# Altium PCB bt-kbd-v2a.PcbDoc
Units mm, origin at the board's own origin, x right, y up, seen from the top; angles counter-clockwise.
Board outline 60.7 x 53 mm, 2 copper layers (Top Layer, Bottom Layer), stack 0.781 mm thick; 60 components, 23 nets, 380 pads, 109 vias.
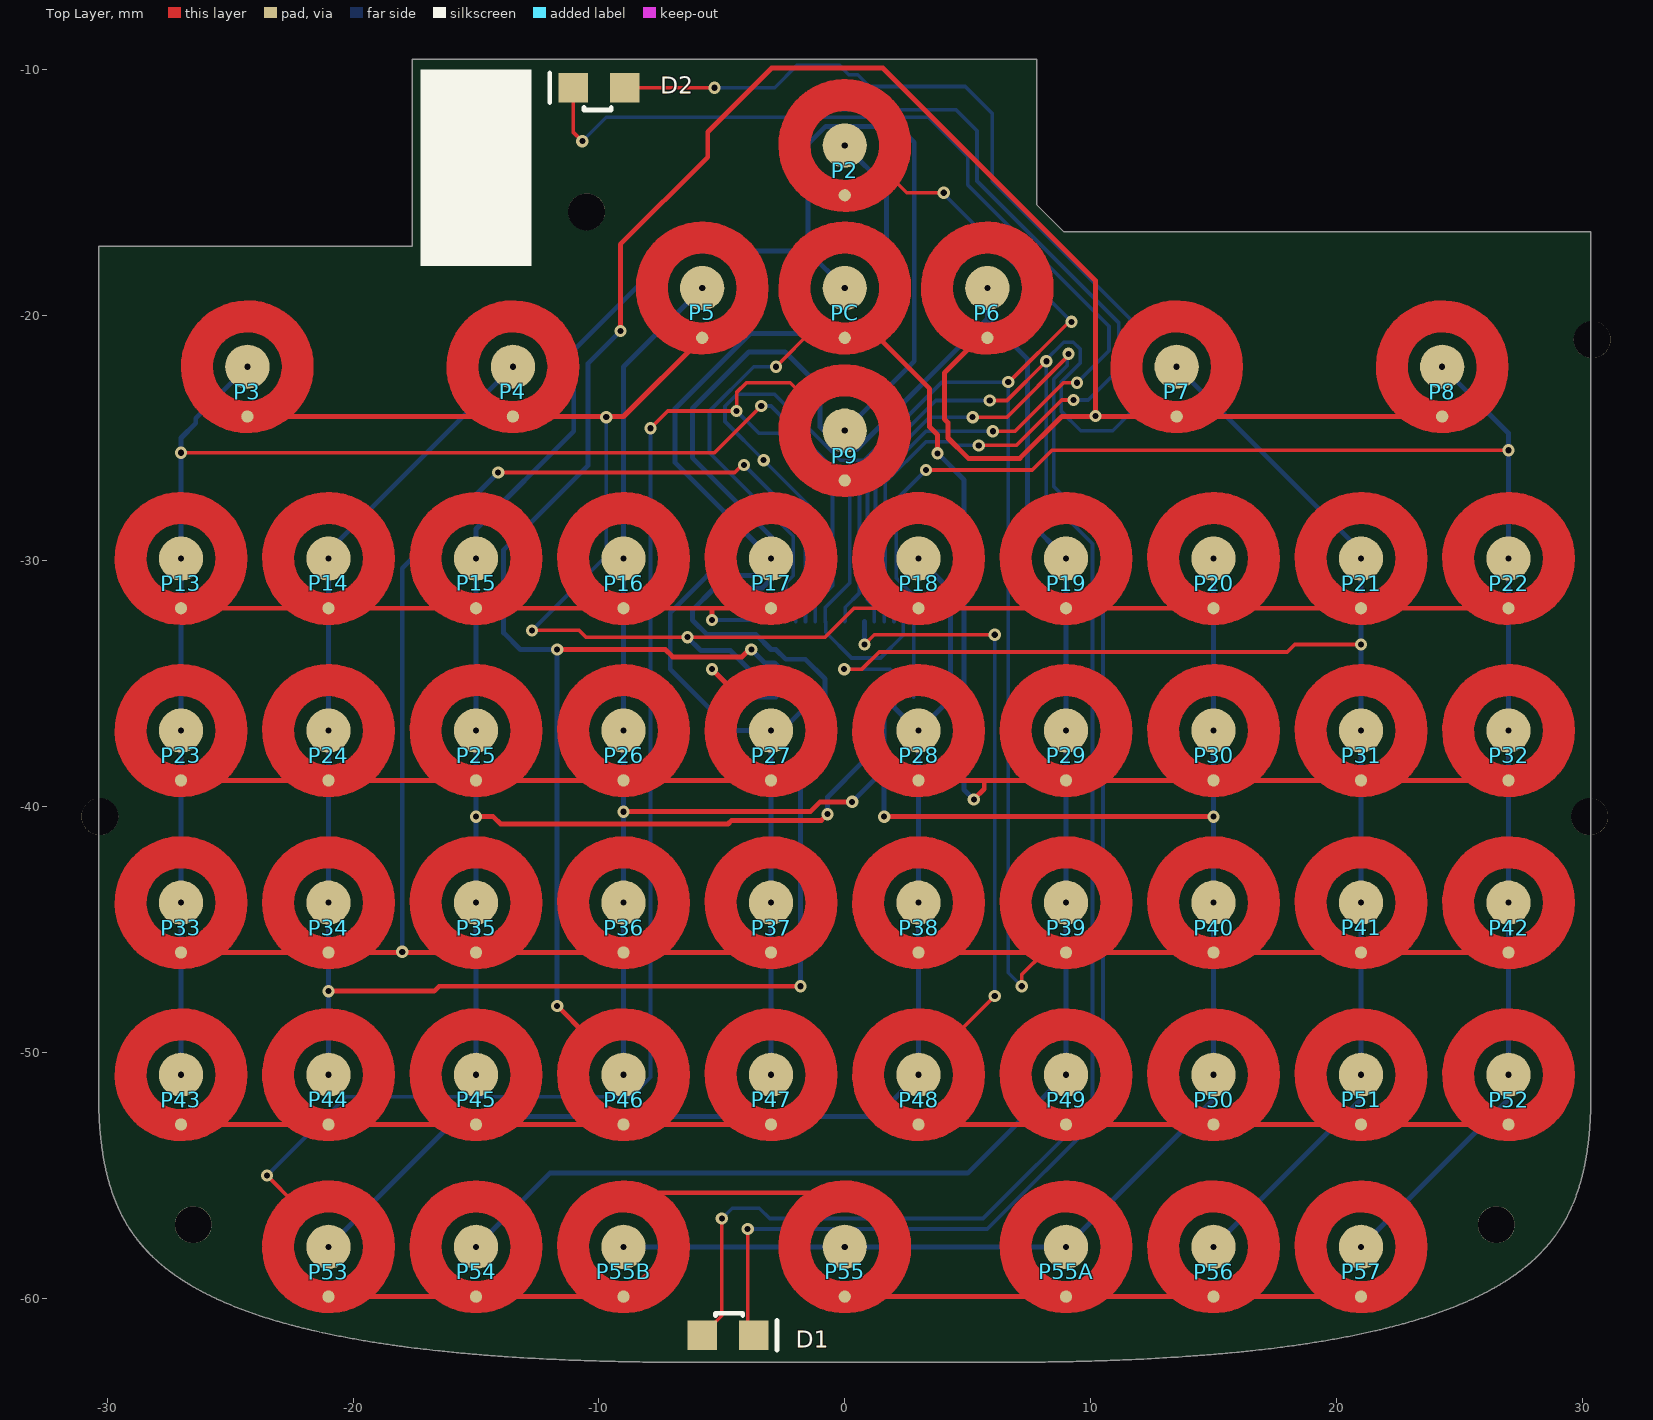
[diagram p0: Top Layer view]
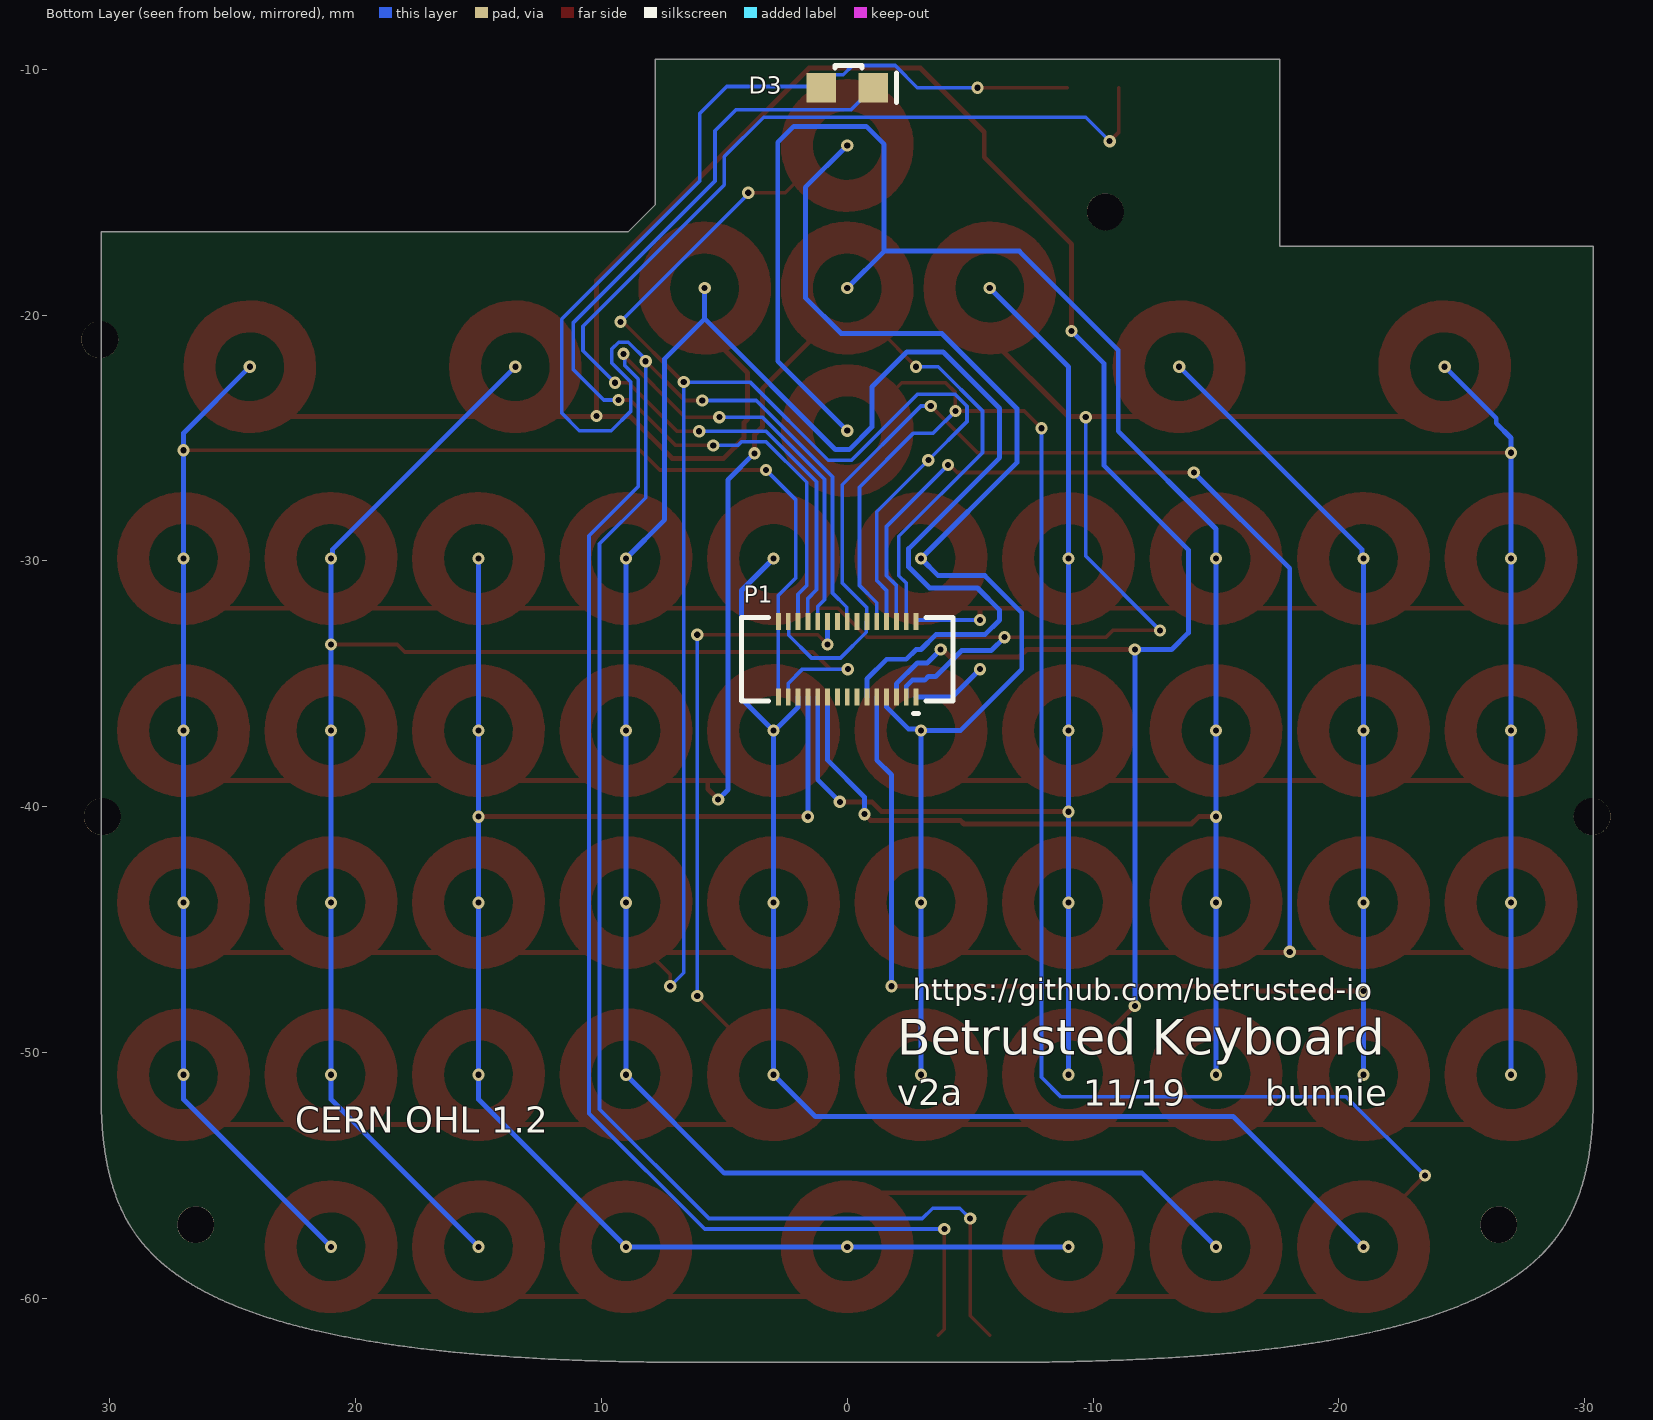
[diagram p1: Bottom Layer view, seen from below]

## Layer stack, top to bottom
Top Solder: solder mask 0.0102, Solder Resist, Dk 3.5
Top Layer: signal copper 0.035
Dielectric 1: core 0.7112, Core-039, Dk 4.8
Bottom Layer: signal copper 0.035
Bottom Solder: solder mask 0.0102, Solder Resist, Dk 3.5

## Board outline
754 vertices, not listed, extent -30.35,-62.6 30.35,-9.6

## Design rules (kind name [scope] priority, off if disabled: settings)
Clearance [All] p1: gap=0.15 ignorepadtopadclearanceinfootprint=FALSE
MinimumSolderMaskSliver [All] p1 off: minsoldermaskwidth=0.254
PolygonConnect [All] p1: connectstyle=Relief reliefconductorwidth=0.254 reliefentries=4 polygonreliefangle="90 Angle" airgapwidth=0.254
RoomDefinition kbd [InComponentClass('kbd')] p1 off: confinementstyle=ConfineIn formatcopy=TRUE lockcomponents=FALSE outline 31.498,-61.146 36.098,-61.146 36.098,-49.446 31.498,-49.446
RoutingVias [All] p1: holewidth=0.25 width=0.5 viastyle="Through Hole" minholewidth=0.25 minwidth=0.5 maxholewidth=0.25 maxwidth=0.5
SilkToSilkClearance [All] p1 off: silktosilkclearance=0.254
SilkToSolderMaskClearance [IsPad] p1 off: minsilkscreentomaskgap=0.254 clearancetoexposedcopper=TRUE
SolderMaskExpansion [All] p1 off: expansion=0.102
Width [All] p1: maxlimit=5 minlimit=0.15 preferedwidth=0.2
27 further rules are at their usual default settings.

## Components (designator, comment, footprint, x,y, rotation, side; value= is the part's Value field where it differs from the comment)
D1 "white SML-R1" ROHM_SML-R1 -4.75,-61.5 r270 top
D2 "white SML-R1" ROHM_SML-R1 -10,-10.75 r90 top
D3 "white SML-R1" ROHM_SML-R1 0,-10.75 r270 bottom
P1 "DF40C-30DS-0.4V(51)" HRS_DF40C-30DS-0.4V(51) 0,-34 r180 bottom
P2 "4mm Dome" 4MM_DOME_SW#1 0,-13.1 r0 top
P3 "4mm Dome" 4MM_DOME_SW#2 -24.3,-22.1 r0 top
P4 "4mm Dome" 4MM_DOME_SW#1 -13.5,-22.1 r0 top
P5 "4mm Dome" 4MM_DOME_SW#2 -5.8,-18.9 r0 top
P6 "4mm Dome" 4MM_DOME_SW#1 5.8,-18.9 r0 top
P7 "4mm Dome" 4MM_DOME_SW#1 13.5,-22.1 r0 top
P8 "4mm Dome" 4MM_DOME_SW#2 24.3,-22.1 r0 top
P9 "4mm Dome" 4MM_DOME_SW#1 0,-24.7 r0 top
P13 "4mm Dome" 4MM_DOME_SW#2 -27,-29.9 r0 top
P14 "4mm Dome" 4MM_DOME_SW#1 -21,-29.9 r0 top
P15 "4mm Dome" 4MM_DOME_SW#3 -15,-29.9 r0 top
P16 "4mm Dome" 4MM_DOME_SW#1 -9,-29.9 r0 top
P17 "4mm Dome" 4MM_DOME_SW#1 -3,-29.9 r0 top
P18 "4mm Dome" 4MM_DOME_SW#3 3,-29.9 r0 top
P19 "4mm Dome" 4MM_DOME_SW#1 9,-29.9 r0 top
P20 "4mm Dome" 4MM_DOME_SW#1 15,-29.9 r0 top
P21 "4mm Dome" 4MM_DOME_SW#1 21,-29.9 r0 top
P22 "4mm Dome" 4MM_DOME_SW#2 27,-29.9 r0 top
P23 "4mm Dome" 4MM_DOME_SW#2 -27,-36.9 r0 top
P24 "4mm Dome" 4MM_DOME_SW#1 -21,-36.9 r0 top
P25 "4mm Dome" 4MM_DOME_SW#3 -15,-36.9 r0 top
P26 "4mm Dome" 4MM_DOME_SW#1 -9,-36.9 r0 top
P27 "4mm Dome" 4MM_DOME_SW#1 -3,-36.9 r0 top
P28 "4mm Dome" 4MM_DOME_SW#2 3,-36.9 r0 top
P29 "4mm Dome" 4MM_DOME_SW#3 9,-36.9 r0 top
P30 "4mm Dome" 4MM_DOME_SW#3 15,-36.9 r0 top
P31 "4mm Dome" 4MM_DOME_SW#1 21,-36.9 r0 top
P32 "4mm Dome" 4MM_DOME_SW#1 27,-36.9 r0 top
P33 "4mm Dome" 4MM_DOME_SW#2 -27,-43.9 r0 top
P34 "4mm Dome" 4MM_DOME_SW#3 -21,-43.9 r0 top
P35 "4mm Dome" 4MM_DOME_SW#1 -15,-43.9 r0 top
P36 "4mm Dome" 4MM_DOME_SW#1 -9,-43.9 r0 top
P37 "4mm Dome" 4MM_DOME_SW#2 -3,-43.9 r0 top
P38 "4mm Dome" 4MM_DOME_SW#2 3,-43.9 r0 top
P39 "4mm Dome" 4MM_DOME_SW#1 9,-43.9 r0 top
P40 "4mm Dome" 4MM_DOME_SW#1 15,-43.9 r0 top
P41 "4mm Dome" 4MM_DOME_SW#1 21,-43.9 r0 top
P42 "4mm Dome" 4MM_DOME_SW#3 27,-43.9 r0 top
P43 "4mm Dome" 4MM_DOME_SW#2 -27,-50.9 r0 top
P44 "4mm Dome" 4MM_DOME_SW#3 -21,-50.9 r0 top
P45 "4mm Dome" 4MM_DOME_SW#1 -15,-50.9 r0 top
P46 "4mm Dome" 4MM_DOME_SW#3 -9,-50.9 r0 top
P47 "4mm Dome" 4MM_DOME_SW#2 -3,-50.9 r0 top
P48 "4mm Dome" 4MM_DOME_SW#1 3,-50.9 r0 top
P49 "4mm Dome" 4MM_DOME_SW#1 9,-50.9 r0 top
P50 "4mm Dome" 4MM_DOME_SW#1 15,-50.9 r0 top
P51 "4mm Dome" 4MM_DOME_SW#1 21,-50.9 r0 top
P52 "4mm Dome" 4MM_DOME_SW#1 27,-50.9 r0 top
P53 "4mm Dome" 4MM_DOME_SW#1 -21,-57.9 r0 top
P54 "4mm Dome" 4MM_DOME_SW#3 -15,-57.9 r0 top
P55 "4mm Dome" 4MM_DOME_SW#4 0,-57.9 r0 top
P55A "4mm Dome" 4MM_DOME_SW#1 9,-57.9 r0 top
P55B "4mm Dome" 4MM_DOME_SW#1 -9,-57.9 r0 top
P56 "4mm Dome" 4MM_DOME_SW#3 15,-57.9 r0 top
P57 "4mm Dome" 4MM_DOME_SW#2 21,-57.9 r0 top
PC "4mm Dome" 4MM_DOME_SW#1 0,-18.9 r0 top

## Footprints (in the part's own frame and the unit in brackets; to place one, negate y for a bottom-side part, rotate by r counter-clockwise, add the part's x,y. Pads: shape width x height; smd on the part's side, far side on the other; paste and mask are expansions set on the pad)
4MM_DOME_SW#1 [mm] "4mm diameter dome switch footprint"
  round 1.8 smd mask+2.1: 1(0,0)
  round 0.5 smd: 2(0,-2.025)
  Top Layer lines w1.3: -2.031,-0.277 ccw(c0,0) 1.718,-1.118 ccw(c0,0) 2.05,0 ccw(c0,0) -2.031,-0.277
  body extent -2,-2 2,2, height 0.3
4MM_DOME_SW#2 [mm] "4mm diameter dome switch footprint"
  round 1.8 smd mask+2.1: 1(0,0)
  round 0.5 smd: 2(0,-2.025)
  Top Layer lines w1.3: 0.319,-2.025 cw(c0,0) 2.05,0 cw(c0,0) 0.319,-2.025
  body extent -2,-2 2,2, height 0.3
4MM_DOME_SW#3 [mm] "4mm diameter dome switch footprint"
  round 1.8 smd mask+2.1: 1(0,0)
  round 0.5 smd: 2(0,-2.025)
  Top Layer lines w1.3: -2.048,0.1 ccw(c0,0) -0.319,-2.025 ccw(c0,0) 0.319,-2.025 ccw(c0,0) 2.05,0 ccw(c0,0) -2.048,0.1
  body extent -2,-2 2,2, height 0.3
4MM_DOME_SW#4 [mm] "4mm diameter dome switch footprint"
  round 1.8 smd mask+2.1: 1(0,0)
  round 0.5 smd: 2(0,-2.025)
  Top Layer lines w1.3: -2.048,0.098 cw(c0,0) -0.534,1.979 cw(c0,0) 2.05,0 cw(c0,0) 0.319,-2.025 cw(c0,0) -0.319,-2.025 cw(c0,0) -2.048,0.098
  body extent -2,-2 2,2, height 0.3
HRS_DF40C-30DS-0.4V(51) [mm] "0.4mm Pitch, Board to Board Connector, 1.5mm mated height"
  rect 0.2x0.7 smd mask+0.06: 1(2.8,-1.54) 2(2.4,-1.54) 3(2,-1.54) 4(1.6,-1.54) 5(1.2,-1.54) 6(0.8,-1.54) 7(0.4,-1.54) 8(0,-1.54) 9(-0.4,-1.54) 10(-0.8,-1.54) 11(-1.2,-1.54) 12(-1.6,-1.54) 13(-2,-1.54) 14(-2.4,-1.54) 15(-2.8,-1.54) 16(2.8,1.54) 17(2.4,1.54) 18(2,1.54) 19(1.6,1.54) 20(1.2,1.54) 21(0.8,1.54) 22(0.4,1.54) 23(0,1.54) 24(-0.4,1.54) 25(-0.8,1.54) 26(-1.2,1.54) 27(-1.6,1.54) 28(-2,1.54) 29(-2.4,1.54) 30(-2.8,1.54)
  silkscreen extent -4.3,-2.2 4.3,1.7, body extent -4.3,-1.69 4.3,1.69, height 1.44
ROHM_SML-R1 [mm] "PICOLED-side firing, 0.2mm thick"
  rect 1.2x1.2 smd mask+0.07: 1(0,-1.05) 2(0,1.05)
  silkscreen extent -0.9,-0.5 0.6,2, body extent -0.75,-0.8 0.35,0.8, height 0.2

## Part data
D1 D2 D3: library part LED2, "Red LED", MPN=SMLR13WBDW, LatestRevisionDate=17-Jul-2002, LatestRevisionNote="Re-released for DXP Platform.", MYPN=D-LED-WHT-SIDE-0.2mm, PackageReference=3.2X1.6X1.1, PackageVersion=Feb-2002, Published=8-Jun-2000, Publisher="Altium Limited", VENDOR=ROHM
P1: library part "Header 15X2A", "Header, 15-Pin, Dual row", LatestRevisionDate=17-Jul-2002, LatestRevisionNote="Re-released for DXP Platform.", MPN=DF40C-30DS-0.4V(51), MYPN="J-DF40C-30DS-0.4V(51) or DF40JC-30DS-0.4V(53)", Publisher="Altium Limited", System=Connector, VENDOR=Hirose
P2 P3 P4 P5 P6 P7 P8 P9 P13 P14 P15 P16 P17 P18 P19 P20 P21 P22 P23 P24 P25 P26 P27 P28 P29 P30 P31 P32 P33 P34 P35 P36 P37 P38 P39 P40 P41 P42 P43 P44 P45 P46 P47 P48 P49 P50 P51 P52 P53 P54 P55 P55A P55B P56 P57 PC: library part "Header 2", "Header, 2-Pin", LatestRevisionDate=17-Jul-2002, LatestRevisionNote="Re-released for DXP Platform.", Publisher="Altium Limited"

## Free pads (board coordinates)
  round 1.5 hole 1.5 unplated mask+0.5: 0(-30.3,-40.4) 0(-26.5,-57) 0(-10.5,-15.8) 0(26.5,-57) 0(30.3,-40.4) 0(30.4,-21)
  rect 2.489x0.051 on Bottom Overlay: 1(14.914,-48.786) 1(14.914,-48.735) 1(14.914,-48.837) 1(17.2,-46.449)
  rect 2.54x0.051 on Bottom Overlay: 1(14.939,-49.091) 1(14.939,-48.989) 1(14.939,-48.939) 1(14.939,-48.888) 1(14.939,-48.685) 1(14.939,-48.583) 1(14.939,-48.532) 1(14.939,-49.04) 1(14.939,-48.634) 1(14.939,-48.481) 1(15.041,-48.278) 1(19.359,-48.278) 1(19.461,-49.04) 1(19.461,-48.989) 1(19.461,-48.939) 1(19.461,-48.888) 1(19.461,-48.837) 1(19.461,-48.786) 1(19.461,-48.735) 1(19.461,-48.685) 1(19.461,-48.634) 1(19.461,-48.583) 1(19.461,-48.532) 1(19.461,-48.481)
  rect 2.591x0.051 on Bottom Overlay: 1(14.965,-49.193) 1(14.965,-49.142) 1(14.965,-48.431) 1(14.965,-48.38) 1(14.965,-48.329) 1(15.016,-49.243) 1(19.384,-49.243) 1(19.435,-49.142) 1(19.435,-49.091) 1(19.435,-48.38) 1(19.435,-49.193) 1(19.435,-48.431)
  rect 0.102x0.051 on Bottom Overlay: 1(15.041,-45.992) 1(16.108,-51.225) 1(18.292,-51.225) 1(19.359,-45.992)
  rect 0.254x0.051 on Bottom Overlay: 1(15.066,-51.479) 1(15.066,-46.043) 1(16.082,-51.174) 1(18.318,-51.174) 1(19.334,-51.479) 1(19.334,-46.043)
  rect 0.356x0.051 on Bottom Overlay: 1(15.066,-51.428) 1(15.066,-46.094) 1(16.032,-51.123) 1(18.368,-51.123) 1(19.334,-46.094)
  rect 0.152x0.051 on Bottom Overlay: 1(15.066,-51.529) 1(19.334,-51.529)
  rect 0.457x0.051 on Bottom Overlay: 1(15.066,-46.145)
  rect 0.508x0.051 on Bottom Overlay: 1(15.092,-51.377) 1(19.308,-51.377) 1(19.308,-46.145)
  rect 0.61x0.051 on Bottom Overlay: 1(15.092,-51.326) 1(15.092,-46.195) 1(19.308,-46.195)
  rect 0.711x0.051 on Bottom Overlay: 1(15.092,-46.246)
  rect 0.864x0.051 on Bottom Overlay: 1(15.117,-51.225) 1(15.117,-46.297) 1(17.2,-45.23) 1(19.283,-51.225) 1(19.283,-46.297)
  rect 0.965x0.051 on Bottom Overlay: 1(15.117,-46.348) 1(17.2,-45.383) 1(17.2,-45.332) 1(17.2,-45.281) 1(19.283,-46.348)
  rect 0.762x0.051 on Bottom Overlay: 1(15.117,-51.275) 1(19.283,-51.275) 1(19.283,-46.246)
  rect 1.016x0.051 on Bottom Overlay: 1(15.143,-51.174) 1(17.175,-45.433) 1(19.257,-51.174)
  rect 2.337x0.051 on Bottom Overlay: 1(15.143,-49.294) 1(15.905,-47.77) 1(19.257,-49.294)
  rect 1.219x0.051 on Bottom Overlay: 1(15.143,-46.449) 1(17.175,-45.992) 1(19.257,-46.449)
  rect 1.118x0.051 on Bottom Overlay: 1(15.143,-46.399) 1(15.143,-51.123) 1(17.175,-45.738) 1(19.257,-51.123) 1(19.257,-46.399)
  rect 2.286x0.051 on Bottom Overlay: 1(15.168,-48.227) 1(18.47,-47.77) 1(19.181,-48.227)
  rect 2.134x0.051 on Bottom Overlay: 1(15.295,-49.345) 1(15.803,-47.821) 1(18.597,-47.821) 1(19.105,-49.345)
  rect 1.829x0.051 on Bottom Overlay: 1(15.346,-50.971) 1(15.447,-50.717) 1(15.498,-50.615) 1(15.498,-49.447) 1(15.498,-48.126) 1(15.549,-49.497) 1(15.549,-48.075) 1(15.752,-50.056) 1(15.752,-50.005) 1(18.648,-50.056) 1(18.648,-50.005) 1(18.8,-48.024) 1(18.851,-50.564) 1(18.851,-49.497) 1(18.851,-49.447) 1(18.851,-48.075) 1(18.902,-50.666) 1(18.902,-50.615) 1(18.902,-48.126) 1(18.953,-50.717) 1(19.054,-50.971)
  rect 1.93x0.051 on Bottom Overlay: 1(15.346,-50.92) 1(15.651,-49.599) 1(15.651,-47.923) 1(15.752,-49.904) 1(15.752,-49.853) 1(18.648,-49.904) 1(18.648,-49.853) 1(18.749,-49.599) 1(18.749,-47.923) 1(18.8,-49.548) 1(19.054,-50.92)
  rect 2.032x0.051 on Bottom Overlay: 1(15.346,-48.177) 1(15.701,-49.701) 1(15.752,-49.802) 1(15.752,-49.751) 1(18.648,-49.802) 1(18.648,-49.751) 1(18.648,-49.701) 1(19.054,-48.177)
  rect 1.676x0.051 on Bottom Overlay: 1(15.371,-51.072) 1(15.727,-50.209)
  rect 1.778x0.051 on Bottom Overlay: 1(15.371,-51.021) 1(15.524,-50.564) 1(15.574,-50.513) 1(15.574,-50.463) 1(15.625,-50.412) 1(15.676,-50.31) 1(18.724,-50.31) 1(18.775,-50.412) 1(18.826,-50.513) 1(18.826,-50.463) 1(19.029,-51.021)
  rect 1.88x0.051 on Bottom Overlay: 1(15.371,-50.869) 1(15.371,-50.818) 1(15.422,-50.767) 1(15.473,-50.666) 1(15.473,-49.396) 1(15.574,-49.548) 1(15.574,-48.024) 1(15.625,-47.973) 1(15.727,-49.955) 1(18.622,-49.955) 1(18.775,-47.973) 1(18.927,-49.396) 1(18.978,-50.818) 1(18.978,-50.767) 1(19.029,-50.869)
  rect 1.727x0.051 on Bottom Overlay: 1(15.651,-50.361) 1(15.701,-50.259) 1(15.752,-50.158) 1(15.752,-50.107) 1(17.175,-46.297) 1(18.648,-50.209) 1(18.648,-50.158) 1(18.648,-50.107) 1(18.699,-50.259) 1(18.749,-50.361) 1(19.003,-51.072)
  rect 1.981x0.051 on Bottom Overlay: 1(15.676,-49.65) 1(15.727,-47.872) 1(17.2,-46.348) 1(18.673,-47.872) 1(18.724,-49.65)
  rect 4.674x0.051 on Bottom Overlay: 1(17.175,-47.313)
  rect 5.08x0.051 on Bottom Overlay: 1(17.175,-47.008)
  rect 4.877x0.051 on Bottom Overlay: 1(17.175,-47.161)
  rect 4.826x0.051 on Bottom Overlay: 1(17.2,-47.719) 1(17.2,-47.669) 1(17.2,-47.211)
  rect 4.724x0.051 on Bottom Overlay: 1(17.2,-47.618) 1(17.2,-47.262) 1(17.2,-47.567)
  rect 4.623x0.051 on Bottom Overlay: 1(17.2,-47.465) 1(17.2,-47.415) 1(17.2,-47.364) 1(17.2,-47.516)
  rect 5.029x0.051 on Bottom Overlay: 1(17.2,-47.059)
  rect 5.131x0.051 on Bottom Overlay: 1(17.2,-46.957)
  rect 5.232x0.051 on Bottom Overlay: 1(17.2,-46.907)
  rect 5.334x0.051 on Bottom Overlay: 1(17.2,-46.856) 1(17.2,-46.805)
  rect 5.537x0.051 on Bottom Overlay: 1(17.2,-46.703) 1(17.2,-46.653) 1(17.2,-46.551)
  rect 5.639x0.051 on Bottom Overlay: 1(17.2,-46.602)
  rect 5.436x0.051 on Bottom Overlay: 1(17.2,-46.5) 1(17.2,-46.754)
  rect 1.473x0.051 on Bottom Overlay: 1(17.2,-46.246)
  rect 1.27x0.051 on Bottom Overlay: 1(17.2,-46.195) 1(17.2,-46.145) 1(17.2,-46.094) 1(17.2,-46.043)
  rect 1.168x0.051 on Bottom Overlay: 1(17.2,-45.941) 1(17.2,-45.891) 1(17.2,-45.84) 1(17.2,-45.789)
  rect 1.067x0.051 on Bottom Overlay: 1(17.2,-45.586) 1(17.2,-45.535) 1(17.2,-45.484) 1(17.2,-45.687) 1(17.2,-45.637)
  rect 4.928x0.051 on Bottom Overlay: 1(17.2,-47.11)
  rect 2.184x0.051 on Bottom Overlay: 1(17.2,-46.399)
  rect 0.66x0.051 on Bottom Overlay: 1(19.283,-51.326)
  rect 0.406x0.051 on Bottom Overlay: 1(19.308,-51.428)
  rect 2.642x0.051 on Bottom Overlay: 1(19.41,-48.329)

## Via types
v1: diameter 0.5, hole 0.25, Top Layer to Bottom Layer, tented both sides, 109 vias

## Nets (pads, with @x,y where several pads share a name; then routed paths per layer and width w, separated by ;. In a path a pad name is that pad's centre, name@x,y a point inside that pad or via, vN(x,y) a via of type N, cw(c..) or ccw(c..) an arc to the next point about the centre after c; other vN are vias at no path point)
KEY0: P1.16 P13.2 P14.2 P15.2 P16.2 P17.2 | length 27.1
  Top Layer w0.2: P13.2 -26.681,-31.925 -21.319,-31.925 P14.2 -20.681,-31.925 -15.319,-31.925 P15.2 -14.681,-31.925 -9.319,-31.925 P16.2 -8.681,-31.925 -5.4,-31.925 ; v1(-5.4,-32.4) -5.4,-31.925 ; P17.2@-3,-31.95 -3.025,-31.925 -3.319,-31.925 -5.4,-31.925
  Bottom Layer w0.15: v1(-5.4,-32.4) -2.825,-32.4 -2.8,-32.425 P1.16
KEY1: P1.1 P23.2 P24.2 P25.2 P26.2 P27.2 | length 28.5
  Top Layer w0.2: P23.2 -26.681,-38.925 -24,-38.925 -21.319,-38.925 P24.2 -20.681,-38.925 -15.319,-38.925 P25.2 -14.681,-38.925 -9.319,-38.925 -8.681,-38.925 -3.319,-38.925 P27.2 ; v1(-5.4,-34.4) -4.408,-35.392 -4.408,-35.41
  Bottom Layer w0.2: v1(-5.4,-34.4) -4.26,-35.54 P1.1
KEY2: P1.18 P33.2 P34.2 P35.2 P36.2 P37.2 | length 62.8
  Top Layer w0.15: v1(-14.1,-26.4) -4.472,-26.4 -4.172,-26.1 v1(-4.1,-26.1)
  Top Layer w0.2: P33.2 -26.681,-45.925 -21.319,-45.925 P34.2 -20.681,-45.925 -15.319,-45.925 P35.2 -14.681,-45.925 -9.319,-45.925 P36.2 -8.681,-45.925 -3.319,-45.925 P37.2
  Bottom Layer w0.15: v1(-4.1,-26.1) -1.6,-28.6 -1.6,-30.6 -2,-31 P1.18
  Bottom Layer w0.2: v1(-18,-45.9) -18,-30.3 v1(-14.1,-26.4)
KEY3: P1.3 P6.2 P7.2 P8.2 P43.2 P44.2 P45.2 P46.2 P47.2 | length 129.2
  Top Layer w0.2: P43.2 -26.681,-52.925 -21.319,-52.925 P44.2 -20.681,-52.925 -15.319,-52.925 P45.2 -14.681,-52.925 -9.319,-52.925 P46.2 -8.681,-52.925 -3.319,-52.925 P47.2 ; v1(-11.7,-48.1) -10.475,-49.325 -10.312,-49.325 ; v1(-11.7,-33.6) -7.3,-33.6 -7,-33.9 -4.181,-33.9 -3.881,-33.6 v1(-3.8,-33.6) ; v1(-9.125,-20.65) -9.125,-17.125 -5.575,-13.575 -5.575,-12.55 -2.975,-9.95 1.55,-9.95 10.2,-18.6 v1(10.2,-24.1) ; 5.481,-20.925 4.05,-22.356 4.05,-24.225 4.2,-24.375 4.2,-25 5.025,-25.825 7.125,-25.825 8.825,-24.125 13.181,-24.125 ; P7.2 13.819,-24.125 23.981,-24.125 P8.2
  Bottom Layer w0.2: v1(-11.7,-48.1) v1(-11.7,-33.6) -13.2,-33.6 -13.875,-32.925 -13.875,-29.55 -10.45,-26.125 -10.45,-21.975 v1(-9.125,-20.65) ; v1(-3.8,-33.6) -3.25,-34.15 -2.85,-34.15 -2,-35 P1.3
KEY4: P1.2 P3.2 P4.2 P5.2 P18.2 P19.2 P20.2 P21.2 P22.2 | length 74.1
  Top Layer w0.15: v1(-12.725,-32.825) -10.8,-32.825 -10.525,-33.1 v1(-6.4,-33.1) -0.8,-33.1 0.375,-31.925 2.681,-31.925 P18.2
  Top Layer w0.2: P3.2 -23.981,-24.125 -13.819,-24.125 P4.2 -13.181,-24.125 -9,-24.125 -5.825,-20.95 P5.2 ; 3.319,-31.925 8.681,-31.925 ; P19.2 9.319,-31.925 14.681,-31.925 ; P20.2 15.319,-31.925 20.681,-31.925 ; P21.2 21.319,-31.925 26.681,-31.925 P22.2
  Bottom Layer w0.15: v1(-12.725,-32.825) -9.7,-29.8 v1(-9.7,-24.15)
  Bottom Layer w0.2: v1(-6.4,-33.1) -5.85,-33.65 -4.65,-33.65 -3.6,-34.7 -3.3,-34.7 -3.153,-34.847 -2.647,-34.847 -2.4,-35.095 P1.2
KEY5: P1.17 P28.2 P29.2 P30.2 P31.2 P32.2 PC.2 | length 61.4
  Top Layer w0.15: v1(-2.8,-22.1) -1.279,-20.579 -1.176,-20.579
  Top Layer w0.2: PC.2 0.319,-20.925 ; 1.375,-20.925 3.45,-23 3.45,-24.55 3.775,-24.875 v1(3.775,-25.625) ; P28.2 3.319,-38.925 5.675,-38.925 ; v1(5.25,-39.7) 5.675,-39.275 5.675,-38.925 ; P32.2 26.681,-38.925 21.319,-38.925 P31.2 20.681,-38.925 15.319,-38.925 P30.2 14.681,-38.925 9.319,-38.925 P29.2 8.681,-38.925 5.675,-38.925
  Bottom Layer w0.15: v1(-2.8,-22.1) -3.7,-22.1 -5.5,-23.9 -5.5,-25.6 -2.1,-29 -2.1,-30.6 -2.4,-30.9 P1.17
  Bottom Layer w0.2: v1(3.775,-25.625) 4.85,-26.7 4.85,-39.3 v1(5.25,-39.7)
KEY6: P1.19 P2.2 P38.2 P39.2 P40.2 P41.2 P42.2 | length 88.7
  Top Layer w0.15: 1.718,-14.218 2.525,-15.025 v1(4.025,-15.025) ; v1(6.65,-22.725) 6.678,-22.725 9.128,-20.275 v1(9.225,-20.275) ; v1(7.2,-47.3) 7.2,-46.825 8.1,-45.925
  Top Layer w0.2: P38.2 3.319,-45.925 8.1,-45.925 8.681,-45.925 P39.2 9.319,-45.925 14.681,-45.925 P40.2 15.319,-45.925 20.681,-45.925 P41.2 21.319,-45.925 26.681,-45.925 P42.2
  Bottom Layer w0.15: P1.19 -1.6,-31.2 -1.2,-30.8 -1.2,-28 v1(-3.3,-25.9) -4.875,-24.325 -4.875,-23.703 -4.397,-23.225 -2.85,-23.225 -0.175,-25.9 0.775,-25.9 3.95,-22.725 v1(6.65,-22.725) 6.65,-46.75 v1(7.2,-47.3) ; v1@4.025,-15.075 v1(9.225,-20.275)
KEY7: P1.25 P48.2 P49.2 P50.2 P51.2 P52.2 | length 47.6
  Top Layer w0.15: v1(0.8,-33.4) 1.2,-33 v1(6.1,-33) ; 4.259,-49.282 4.518,-49.282 v1(6.1,-47.7)
  Top Layer w0.2: P48.2 3.319,-52.925 8.681,-52.925 P49.2 9.319,-52.925 14.681,-52.925 P50.2 15.319,-52.925 20.681,-52.925 P51.2 21.319,-52.925 26.681,-52.925 P52.2
  Bottom Layer w0.15: v1(6.1,-47.7) v1(6.1,-33)
  Bottom Layer w0.2: v1(0.8,-33.4) P1.25
KEY8: P1.20 P9.2 P53.2 P54.2 P55.2 P55A.2 P55B.2 P56.2 P57.2 | length 106.3
  Top Layer w0.15: v1(-23.5,-55) -22.358,-56.142 -22.055,-56.142 ; v1(-7.9,-24.6) -7.2,-23.9 v1(-4.4,-23.9) -4.4,-23.15 -4,-22.75 -2.221,-22.75 -1.579,-23.392
  Top Layer w0.2: P53.2 -20.681,-59.925 -15.319,-59.925 P54.2 -14.681,-59.925 -9.319,-59.925 -8.681,-59.925 ; -8.825,-55.7 -0.754,-55.7 -0.534,-55.921 ; -0.319,-59.925 P55.2 0.319,-59.925 8.681,-59.925 9.319,-59.925 14.681,-59.925 P56.2 15.319,-59.925 20.681,-59.925 P57.2
  Bottom Layer w0.15: v1(-23.5,-55) -20.3,-51.8 -8.7,-51.8 -7.9,-51 v1(-7.9,-24.6) ; v1(-4.4,-23.9) -3.5,-24.8 -2.7,-24.8 -0.5,-27 -0.5,-31 -1.2,-31.7 P1.20
KEY9: P1.21 P1.29 P3.1 P13.1 P23.1 P33.1 P43.1 | length 70.2
  Top Layer w0.15: v1(-27,-25.6) -5.3,-25.6 v1(-3.4,-23.7)
  Bottom Layer w0.15: v1(-3.4,-23.7) -3,-23.7 0.2,-26.9 0.2,-30.9 -0.8,-31.9 P1.21 -0.775,-32.485 -0.775,-32.9 0.275,-33.95 1.45,-33.95 2.375,-33.025 2.375,-32.485 P1.29
  Bottom Layer w0.2: v1(-27,-50.9) v1(-27,-43.9) v1(-27,-36.9) v1(-27,-29.9) -27,-25 -26.4,-24.4 -26.4,-24.2 v1(-24.3,-22.1)
KEY10: P1.5 P4.1 P14.1 P24.1 P34.1 P44.1 | length 63.2
  Top Layer w0.2: v1(-21,-47.5) -16.7,-47.5 -16.5,-47.3 v1(-1.8,-47.3)
  Bottom Layer w0.2: v1(-21,-50.9) v1(-21,-43.9) v1(-21,-36.9) v1(-21,-29.9) -20.943,-29.843 -20.943,-29.543 v1(-13.5,-22.1) ; v1(-1.8,-47.3) -1.8,-38.7 -1.2,-38.1 P1.5
KEY11: P1.10 P9.1 P15.1 P25.1 P35.1 P45.1 PC.1 | length 86.5
  Top Layer w0.2: v1(-15,-40.4) -14.3,-40.4 -14,-40.7 -4.75,-40.7 -4.6,-40.55 -0.95,-40.55 v1(-0.7,-40.3)
  Bottom Layer w0.2: v1(-15,-50.9) v1(-15,-43.9) v1(-15,-40.4) v1(-15,-36.9) v1(-15,-29.9) -15,-28.7 -11.025,-24.725 -11.025,-21.425 -7,-17.4 -1.5,-17.4 ; v1(-0.7,-40.3) -0.7,-39.6 0.8,-38.1 P1.10 ; v1(0,-24.7) 2.825,-21.875 2.825,-12.975 2.175,-12.325 -0.775,-12.325 -1.5,-13.05 -1.5,-17.4 ; v1(0,-18.9) -1.5,-17.4
KEY12: P1.11 P5.1 P16.1 P26.1 P36.1 P46.1 | length 47.4
  Top Layer w0.2: v1(-9,-40.2) -1.4,-40.2 -1,-39.8 v1(0.3,-39.8)
  Bottom Layer w0.2: v1(-9,-50.9) v1(-9,-43.9) v1(-9,-40.2) v1(-9,-36.9) v1(-9,-29.9) -9,-22.1 v1(-5.8,-18.9) ; v1(0.3,-39.8) 1.2,-38.9 P1.11
KEY13: P1.4 P2.1 P17.1 P27.1 P37.1 P47.1 | length 53.7
  Bottom Layer w0.2: v1(-3,-50.9) v1(-3,-43.9) v1(-3,-36.9) ; P1.4 -1.6,-35.944 -2.499,-36.843 -2.943,-36.843 v1(-3,-36.9) ; v1(0,-13.1) 1.7,-14.8 1.7,-19.3 0.25,-20.75 -3.85,-20.75 -6.9,-23.8 -6.9,-26 v1(-3,-29.9) -3.7,-30.6 -5.6,-30.6 -7.1,-32.1 -7.1,-34.4 -4.6,-36.9 v1(-3,-36.9)
KEY14: P1.13 P18.1 P28.1 P38.1 P48.1 P53.1 | length 50.8
  Bottom Layer w0.2: v1(-21,-57.9) -15.7,-52.6 1.3,-52.6 v1(3,-50.9) v1(3,-43.9) v1(3,-36.9) ; P1.13 2,-35.944 2.956,-36.9 v1(3,-36.9) ; v1(3,-29.9) 4.3,-31.2 4.3,-35.6 v1(3,-36.9)
KEY15: P1.6 P6.1 P19.1 P29.1 P39.1 P49.1 P54.1 | length 97.9
  Bottom Layer w0.2: v1(-15,-57.9) -12,-54.9 5,-54.9 v1(9,-50.9) v1(9,-43.9) v1(9,-36.9) v1(9,-29.9) 7.425,-28.325 7.425,-21.775 5.8,-20.15 ; P1.6 -0.8,-34.8 -1.6,-34 -2.4,-34 -2.8,-33.6 -3,-33.6 -3.6,-33 -5.6,-33 -6.2,-32.4 -6.2,-32 -5.3,-31.1 -3.354,-31.1 -2.5,-30.246 -2.5,-29.5 -6.2,-25.8 -6.2,-23.8 -3.9,-21.5 -2.425,-21.5 -1,-22.925 -1,-24.55 -0.075,-25.475 0.475,-25.475 5.8,-20.15 ; v1(5.8,-18.9) 5.8,-20.15
KEY16: P1.12 P20.1 P30.1 P40.1 P50.1 P55.1 P55A.1 P55B.1 | length 66.7
  Top Layer w0.2: v1(1.6,-40.4) v1(15,-40.4)
  Bottom Layer w0.2: v1(-9,-57.9) v1(0,-57.9) v1(9,-57.9) 15,-51.9 v1(15,-50.9) v1(15,-43.9) v1(15,-36.9) v1(15,-29.9) ; v1(1.6,-40.4) P1.12
KEY17: P1.14 P7.1 P21.1 P31.1 P41.1 P51.1 P56.1 | length 66.1
  Top Layer w0.15: v1(-0.025,-34.4) 0.7,-34.4 1.4,-33.7 18,-33.7 18.3,-33.4 v1(21,-33.4)
  Bottom Layer w0.15: v1(-0.025,-34.4) 1.816,-34.4 2.4,-34.984 P1.14
  Bottom Layer w0.2: v1(13.5,-22.1) 20.943,-29.543 20.943,-29.843 v1(21,-29.9) v1(21,-33.4) v1(21,-36.9) v1(21,-43.9) v1(21,-50.9) 21,-51.9 v1(15,-57.9)
KEY18: P1.15 P1.30 P8.1 P22.1 P32.1 P42.1 P52.1 P57.1 | length 73.5
  Top Layer w0.15: v1(3.3,-26.3) 7.625,-26.3 8.425,-25.5 v1(27,-25.5)
  Bottom Layer w0.15: P1.15 P1.30 2.8,-31.4 2.1,-30.7 2.1,-27.5 v1(3.3,-26.3)
  Bottom Layer w0.2: v1(21,-57.9) 27,-51.9 v1(27,-50.9) v1(27,-43.9) v1(27,-36.9) v1(27,-29.9) v1(27,-25.5) 27,-24.8 v1(24.3,-22.1)
UP5K_RGB0: D1.2 P1.26 | length 69
  Top Layer w0.15: v1(-3.95,-57.175) -3.95,-61.25 D1.2 ; v1(5.2,-24.15) 6.597,-24.15 9.1,-21.647 v1(9.1,-21.575)
  Bottom Layer w0.15: v1(-3.95,-57.175) 5.8,-57.175 10.5,-52.475 10.5,-28.975 8.5,-26.975 8.5,-22.604 9.054,-22.05 9.054,-21.621 v1(9.1,-21.575) ; P1.26 1.2,-31.85 0.925,-31.575 0.925,-26.675 3.45,-24.15 v1(5.2,-24.15)
UP5K_RGB1: D2.2 P1.27 | length 46.9
  Top Layer w0.15: D2.2 -11.05,-12.55 v1(-10.675,-12.925) ; v1(6.025,-24.725) 6.924,-24.725 8.899,-22.75 v1(9.45,-22.75)
  Bottom Layer w0.15: v1(-10.675,-12.925) -9.7,-11.95 3.4,-11.95 5.004,-13.554 5.004,-14.704 10.75,-20.45 10.75,-21.45 v1(9.45,-22.75) ; P1.27 1.6,-31.525 1.25,-31.175 1.25,-26.775 3.3,-24.725 v1(6.025,-24.725)
UP5K_RGB2: D3.2 P1.28 | length 36.6
  Top Layer w0.15: v1(5.45,-25.3) 6.975,-25.3 8.825,-23.45 v1(9.3,-23.45)
  Bottom Layer w0.15: D3.2 -0.15,-11.65 4.525,-11.65 5.375,-12.5 5.375,-14.55 11.15,-20.325 11.15,-22.2 9.9,-23.45 v1(9.3,-23.45) ; P1.28 2,-31.35 1.65,-31 1.65,-26.8 3.3,-25.15 4.3,-25.15 4.45,-25.3 v1(5.45,-25.3)
VSYS_U: D1.1 D2.1 D3.1 P1.23 | length 108.1
  Top Layer w0.15: D2.1 v1(-5.3,-10.75) ; D1.1 -5,-60.7 v1(-5,-56.75) ; v1(5.9,-23.475) 6.6,-23.475 v1(8.2,-21.875)
  Bottom Layer w0.15: v1(-5.3,-10.75) -2.85,-10.75 -1.95,-9.85 -0.213,-9.85 0.162,-10.225 0.525,-10.225 D3.1 1.1,-10.7 4.9,-10.7 6,-11.8 6,-14.55 11.613,-20.163 11.613,-23.987 10.9,-24.7 9.6,-24.7 8.8,-23.9 8.8,-22.728 9.575,-21.953 9.575,-21.378 9.297,-21.1 8.903,-21.1 8.2,-21.803 v1(8.2,-21.875) 8.2,-27.425 10.075,-29.3 10.075,-52.299 5.624,-56.75 -3.05,-56.75 -3.475,-56.325 -4.575,-56.325 v1(-5,-56.75) ; P1.23 0.015,-32.445 0.015,-31.885 0.6,-31.3 0.6,-26.576 3.701,-23.475 v1(5.9,-23.475)
pads on no net: P1.7 P1.8 P1.9 P1.22 P1.24

## Silkscreen, mask and mechanical layers (free items; w line width, h text height)
Top Overlay:
  rectangle: -17.25,-18 -12.75,-10
Bottom Overlay:
  text "https://github.com/betrusted-io" at -2.675,-48.175 h1.5
  text "Betrusted Keyboard" at -2.043,-50.58 h2.5
  text "v2a" at -2.043,-52.48 h1.8
  text "bunnie" at -17,-52.5 h1.8
  text "11/19" at -9.6,-52.5 h1.8
  text "CERN OHL 1.2" at 22.462,-53.598 h1.8
Mechanical 1:
  drawing of 740 lines, arcs and shapes, not listed
Mechanical 3 (Mech3):
  drawing of 191 lines, arcs and shapes, not listed
  text "Layer" at 38.366,3.002 h1.52
  text "Name" at 48.778,3.002 h1.52
  text "Material" at 72.394,3.002 h1.52
  text "Thickness" at 94.232,3.002 h1.52
  text "Constant" at 110.737,3.002 h1.52
  text "Board Layer Stack" at 125.212,3.002 h1.52
  text "Top Overlay" at 48.778,-0.046 h1.52
  text "Top Solder" at 48.778,-3.094 h1.52
  text "Solder Resist" at 72.394,-3.094 h1.52
  text "0.010mm" at 94.232,-3.094 h1.52
  text "3.5" at 110.737,-3.094 h1.52
  text "1" at 38.366,-6.142 h1.52
  text "Top Layer" at 48.778,-6.142 h1.52
  text "Copper" at 72.394,-6.142 h1.52
  text "0.035mm" at 94.232,-6.142 h1.52
  text "Dielectric 1" at 48.778,-9.19 h1.52
  text "Core-039" at 72.394,-9.19 h1.52
  text "0.711mm" at 94.232,-9.19 h1.52
  text "4.8" at 110.737,-9.19 h1.52
  text "2" at 38.366,-12.238 h1.52
  text "Bottom Layer" at 48.778,-12.238 h1.52
  text "Copper" at 72.394,-12.238 h1.52
  text "0.035mm" at 94.232,-12.238 h1.52
  text "Bottom Solder" at 48.778,-15.286 h1.52
  text "Solder Resist" at 72.394,-15.286 h1.52
  text "0.010mm" at 94.232,-15.286 h1.52
  text "3.5" at 110.737,-15.286 h1.52
  text "Bottom Overlay" at 48.778,-18.334 h1.52
  text "Total board thickness:" at 38.366,-21.382 h1.52
  text "0.802mm" at 94.232,-21.382 h1.52
  text "Finish -- immersion gold" at 38.4,-25.5 h1
  text "Solder mask green / silkscreen white" at 38.4,-27.9 h1
  text "Please also make a version of the PCB with a finished thickness of 1.3mm, +0/-0.2mm" at 89.075,-29.325 h1